# Altium PCB PCB1fb.PcbDoc
Units mil, origin at the board's own origin, x right, y up, seen from the top; angles counter-clockwise.
Board outline 765 x 2040 mil, 2 copper layers (Top Layer, Bottom Layer); 38 components, 55 nets, 170 pads, 23 vias.
Unrouted connection lines stored in the file: 49.
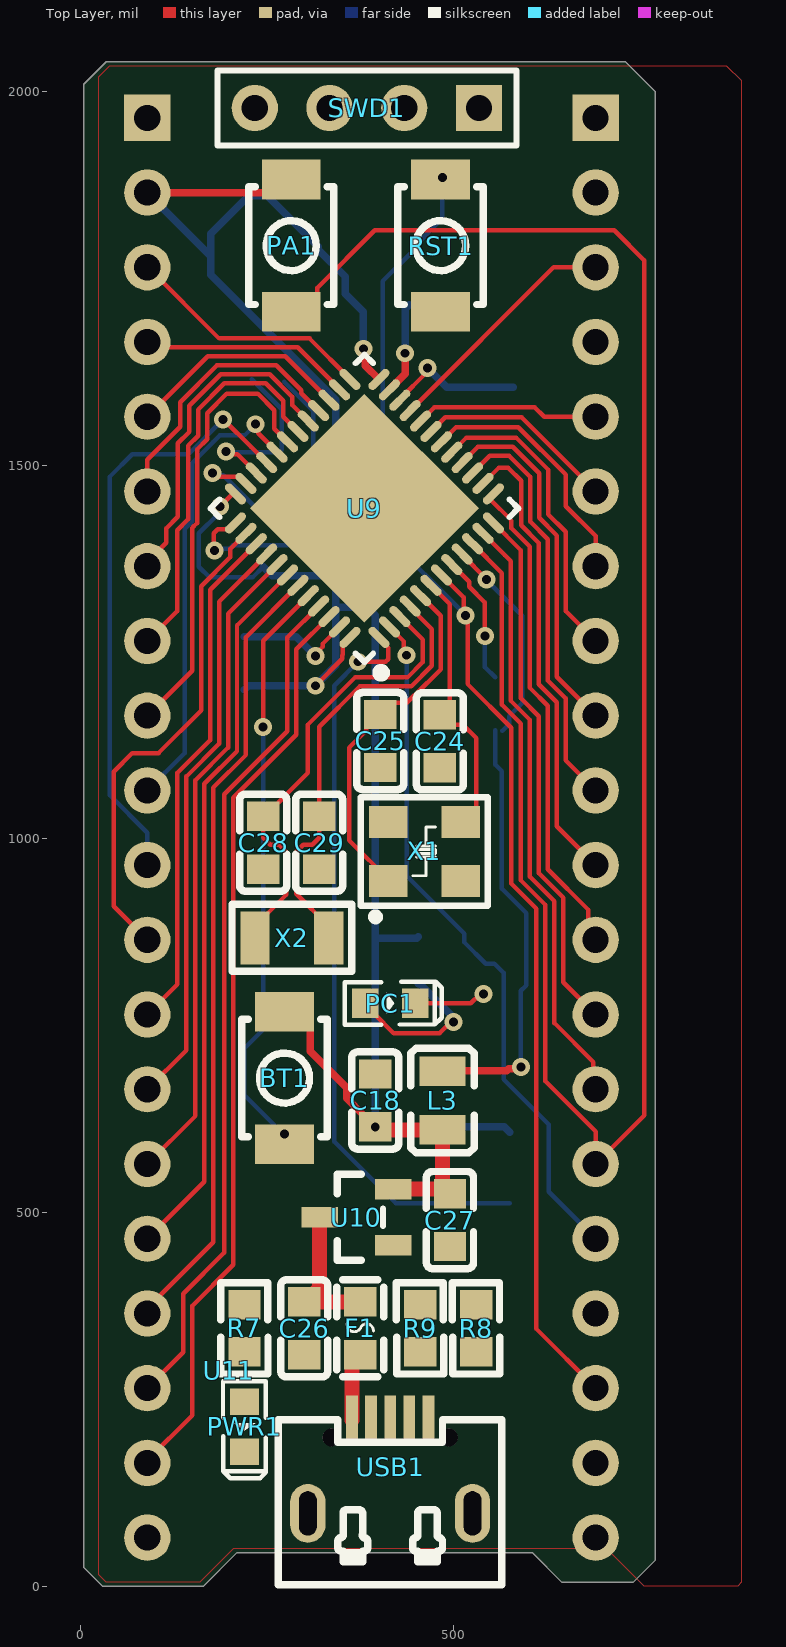
[diagram p0: Top Layer view]
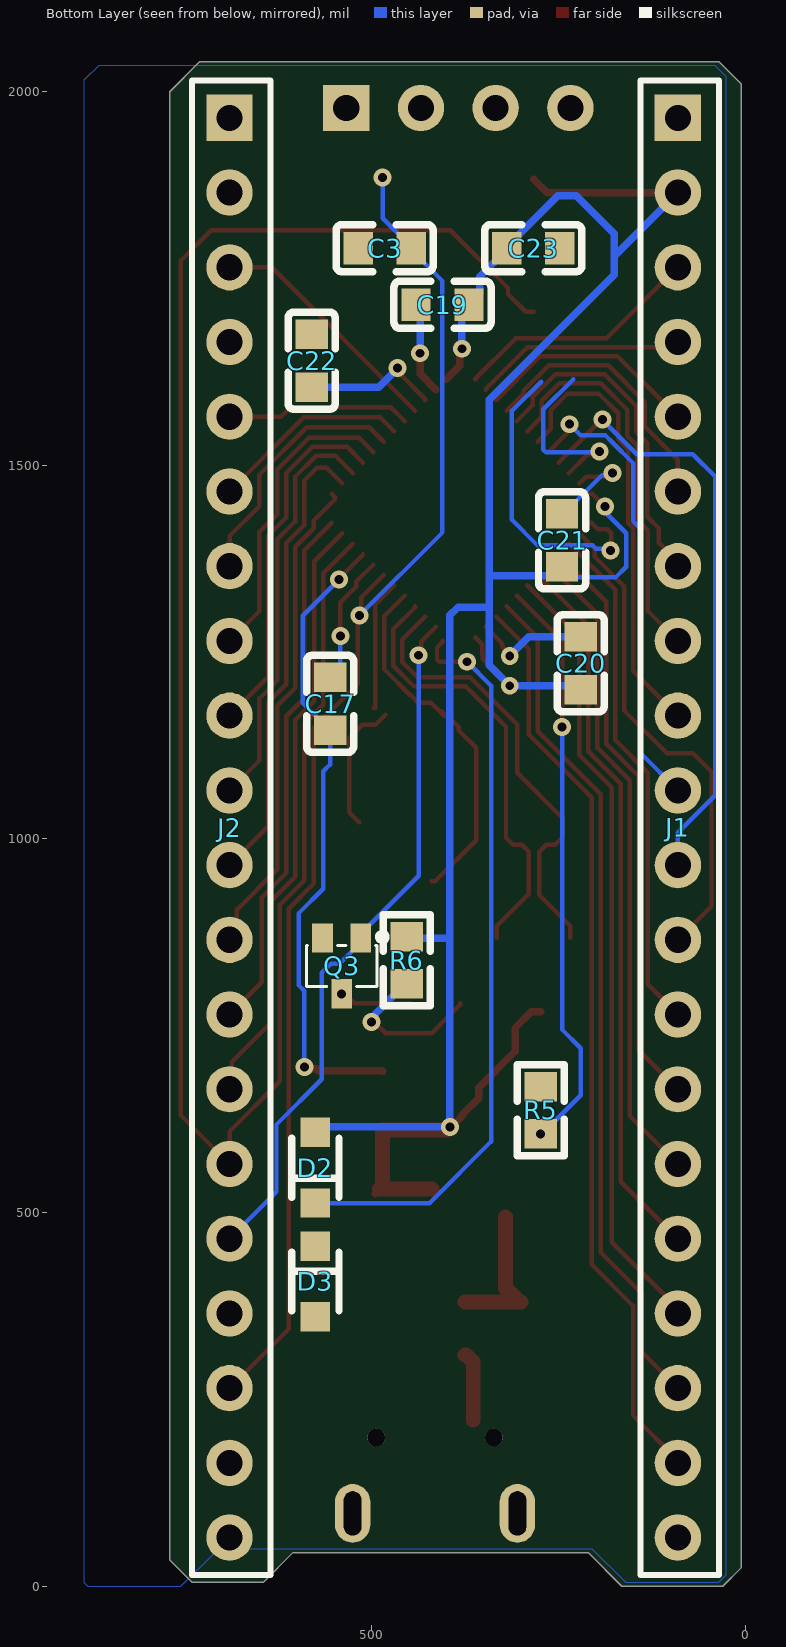
[diagram p1: Bottom Layer view, seen from below]

## Layer stack, top to bottom
Top Solder: solder mask 0.4, Solder Resist, Dk 3.5
Top Layer: signal copper 1.4
Dielectric 1: dielectric 12.6, FR-4, Dk 4.8
Bottom Layer: signal copper 1.4
Bottom Solder: solder mask 0.4, Solder Resist, Dk 3.5

## Board outline
5,25 30,0 165,0 210,45 605,45 645,5 740,5 770,35 770,2000 730,2040 35,2040 5,2010

## Design rules (kind name [scope] priority, off if disabled: settings)
Clearance [All] p1: gap=6 ignorepadtopadclearanceinfootprint=TRUE
PolygonConnect [All] p1: connectstyle=Relief reliefconductorwidth=10 reliefentries=4 polygonreliefangle="90 Angle" airgapwidth=10
RoutingVias [All] p1: holewidth=15.75 width=23.62 viastyle="Through Hole" minholewidth=15.75 minwidth=23.62 maxholewidth=28 maxwidth=50
SolderMaskExpansion [All] p1: expansion=4 istentingtop=FALSE
Width [All] p1: maxlimit=20 minlimit=6 preferedwidth=10
30 further rules are at their usual default settings.

## Components (designator, comment, footprint, x,y, rotation, side; value= is the part's Value field where it differs from the comment)
BT1 "TS-1088R-02026" SW-SMD_L3.9-W3.0-P4.45 273.56,680 r90 top
C3 "0.1u" C0603 482.45,1790.63 r180 bottom
C17 "0.1u" C0603 555.44,1180.85 r90 bottom
C18 "10u" C0603 395,650 r270 top
C19 "0.1u" C0603 405,1715 r180 bottom
C20 "0.1u" C0603 220,1235 r270 bottom
C21 "0.1u" C0603 245,1399.57 r270 bottom
C22 "4.7u" C0603 580,1640 r90 bottom
C23 "0.1u" C0603 283.46,1790.63 r180 bottom
C24 "10p" C0603 481.53,1130.54 r90 top
C25 "10p" C0603 401.71,1131.09 r270 top
C26 "10u" C0603 300,345 r90 top
C27 "1u" C0603 495,490 r90 top
C28 "5p" C0603 245,995 r90 top
C29 "5p" C0603 320,995 r90 top
D2 "BAT54WS_C397611" SOD-323_L1.8-W1.3-LS2.5-RD 575,560 r90 bottom
D3 "BAT54WS_C397611" SOD-323_L1.8-W1.3-LS2.5-RD 575,407.76 r270 bottom
F1 "0.5A/6V" F0603 375,345 r90 top
J1 "HDR-M-2.54_1x20" HDR-M-2.54_1X20 90,1015 r90 bottom locked
J2 "HDR-M-2.54_1x20" HDR-M-2.54_1X20 690,1015 r90 bottom
L3 "10uH" L0805 485,650 r90 top
PA1 "TS-1088R-02026" SW-SMD_L3.9-W3.0-P4.45 282.6,1793.96 r90 top
PC1 "LED-0603_R" LED0603_GREEN 415,780 r0 top
PWR1 "LED-0603_G" LED0603_GREEN 220,213.46 r270 top
Q3 "L2N7002WT1G" SC-70-3_L2.1-W1.3-P1.30-LS2.1-BR 540,830 r90 bottom
R5 "1k" R0603 273.56,636.9 r270 bottom
R6 "1k" R0603 452.69,837.79 r270 bottom
R7 "1k" R0603 220,345 r270 top
R8 "22" R0603 530,345 r270 top
R9 "22" R0603 455,345 r270 top
RST1 "TS-1088R-02026" SW-SMD_L3.9-W3.0-P4.45 482.45,1793.96 r270 top
SWD1 "HDR-M-2.54_1x4" HDR-M-2.54_1X4 383.85,1978.21 r180 top
U9 "STM32F401CCU6" UFQFPN-48_L7.0-W7.0-P0.50-BL-EP 380.55,1442.39 r45 top locked
U10 "XC6206P332MR" SOT-23(SOT-23-3) 369.85,493.85 r90 top
U11 "CH340E" MSOP-10_L3.0-W3.0-P0.50-LS5.0-BL 198.95,288.05 r90 top
USB1 "U-F-M5DW-Y-4" MICRO-USB-A12 415,160 r0 top
X1 "25MHz" XTAL-3225 415.35,945.71 r90 top
X2 "32.768KHz" OSC-SMD_L3.2-W1.5 283.33,867.72 r180 top

## Footprints (in the part's own frame and the unit in brackets; to place one, negate y for a bottom-side part, rotate by r counter-clockwise, add the part's x,y. Pads: shape width x height; smd on the part's side, far side on the other; paste and mask are expansions set on the pad)
C0603 [mm]
  rect 1x1.1 smd: 1(-0.9,0) 2(0.9,0)
  silkscreen extent -1.65,-0.8 1.65,0.8
F0603 [mm]
  rect 1x1.1 smd: 1(-0.9,0) 2(0.9,0)
  silkscreen extent -1.65,-0.8 1.65,0.8
HDR-M-2.54_1X4 [mil]
  rect 62x62 hole 35: 1(-150,0)
  round 62 hole 35: 2(-50,0) 3(50,0) 4(150,0)
  silkscreen extent -200,-50 200,50
HDR-M-2.54_1X20 [mil]
  rect 62x62 hole 35: 1(950,0)
  round 62 hole 35: 2(850,0) 3(750,0) 4(650,0) 5(550,0) 6(450,0) 7(350,0) 8(250,0) 9(150,0) 10(50,0) 11(-50,0) 12(-150,0) 13(-250,0) 14(-350,0) 15(-450,0) 16(-550,0) 17(-650,0) 18(-750,0) 19(-850,0) 20(-950,0)
  silkscreen extent -1000,-55 1000,50
L0805 [mm]
  rect 1x1.55 smd: 1(-1,0) 2(1,0)
  silkscreen extent -1.78,-1.08 1.78,1.08
LED0603_GREEN [mm]
  rect 0.9x1 smd: 1(-0.85,0) 2(0.85,0)
  silkscreen extent -1.54,-0.73 1.75,0.73
MICRO-USB-A12 [mm]
  rect 0.4x1.65 smd: 1(-1.3,1.59) 2(-0.65,1.59) 3(0,1.59) 4(0.65,1.59) 5(1.3,1.59)
  oval 1.2x2 hole 0.6 slot 1.5 at 90 deg: 6(2.799,-1.59) 7(-2.799,-1.59)
  round 0.6 hole 0.6 unplated: ""(-1.999,0.991) ""(1.999,0.991)
  silkscreen extent -3.8,-4.01 3.8,1.59
MSOP-10_L3.0-W3.0-P0.50-LS5.0-BL [mil]
OSC-SMD_L3.2-W1.5 [mm]
  rect 1x1.8 smd: 1(-1.25,0) 2(1.25,0)
  silkscreen extent -2.03,-1.14 2.03,1.14
R0603 [mm]
  rect 1x1.1 smd: 1(0.8,0) 2(-0.8,0)
  silkscreen extent -1.55,-0.81 1.55,0.8
SC-70-3_L2.1-W1.3-P1.30-LS2.1-BR [mm]
  rect 1x0.7 smd: 1(0.95,-0.65) 2(0.95,0.65) 3(-0.95,0)
  silkscreen extent -0.7,-1.63 1.23,1.2
SOD-323_L1.8-W1.3-LS2.5-RD [mm]
  rect 1x1 smd: 1(-1.2,0) 2(1.2,0)
  silkscreen extent -1,-0.8 1,0.8
SOT-23(SOT-23-3) [mm]
  rect 0.7x1.25 smd: 1(-0.95,-1.25) 2(0.95,-1.25) 3(0,1.25)
  silkscreen extent -1.46,-0.9 1.46,0.65
SW-SMD_L3.9-W3.0-P4.45 [mm]
  rect 1.35x2 smd: 1(-2.25,0) 2(2.25,0)
  silkscreen extent -2,-1.45 2,1.45
UFQFPN-48_L7.0-W7.0-P0.50-BL-EP [mm]
  oval 0.28x0.9 smd: 1(-2.751,-3.449) 2(-2.25,-3.449) 3(-1.75,-3.449) 4(-1.25,-3.449) 5(-0.749,-3.449) 6(-0.249,-3.449) 7(0.249,-3.449) 8(0.749,-3.449) 9(1.25,-3.449) 10(1.75,-3.449) 11(2.25,-3.449) 12(2.751,-3.449) 25(2.751,3.449) 26(2.25,3.449) 27(1.75,3.449) 28(1.25,3.449) 29(0.749,3.449) 30(0.249,3.449) 31(-0.249,3.449) 32(-0.749,3.449) 33(-1.25,3.449) 34(-1.75,3.449) 35(-2.25,3.449) 36(-2.751,3.449)
  oval 0.9x0.28 smd: 13(3.449,-2.751) 14(3.449,-2.25) 15(3.449,-1.75) 16(3.449,-1.25) 17(3.449,-0.749) 18(3.449,-0.249) 19(3.449,0.249) 20(3.449,0.749) 21(3.449,1.25) 22(3.449,1.75) 23(3.449,2.25) 24(3.449,2.751) 37(-3.449,2.751) 38(-3.449,2.25) 39(-3.449,1.75) 40(-3.449,1.25) 41(-3.449,0.749) 42(-3.449,0.249) 43(-3.449,-0.249) 44(-3.449,-0.749) 45(-3.449,-1.25) 46(-3.449,-1.75) 47(-3.449,-2.25) 48(-3.449,-2.751)
  rect 5.5x5.5 smd: 49(0,0)
  silkscreen extent -3.7,-4.5 3.7,3.7
XTAL-3225 [mil]
  rect 43.31x51.18 smd: 1(-2,3) 2(-2,-94) 3(77,-94) 4(77,3)
  silkscreen extent -55,-130 110,40, body extent -13,-108 85,18, height 31

## Part data
BT1 PA1 RST1: BOM_Manufacturer=XUNPU, BOM_Manufacturer Part=TS-1088R-02026, BOM_Supplier=LCSC, BOM_Supplier Part=C455280, Contributor=LCSC, spicePre=S, spiceSymbolName=TS-1088R-02026
D2 D3: BOM_Manufacturer=AnBon, BOM_Manufacturer Part=BAT54WS, BOM_Supplier=LCSC, BOM_Supplier Part=C397611, Contributor=LCSC, spicePre=D, spiceSymbolName=BAT54WS_C397611
F1: BOM_Manufacturer=BOURNS, BOM_Manufacturer Part=MF-FSMF050X-2, BOM_Supplier=LCSC, BOM_Supplier Part=C210357, Contributor=LCSC, spicePre=F, spiceSymbolName=MF-FSMF050X-2
L3: BOM_Manufacturer=microgate, BOM_Manufacturer Part=MGFI2012D100KT-LF, BOM_Supplier=LCSC, BOM_Supplier Part=C281097, Contributor=LCSC, nameAlias=Inductance, spicePre=L, spiceSymbolName=MGFI2012D100KT-LF
PC1: BOM_Manufacturer=EVERLIGHT(台湾亿光), BOM_Manufacturer Part=19-217/R6C-AL1M2VY/3T, BOM_Supplier=LCSC, BOM_Supplier Part=C72044, Contributor=LCEDA_01, spicePre=L, spiceSymbolName=LED-0603_R
PWR1: BOM_Manufacturer=EVERLIGHT(台湾亿光), BOM_Manufacturer Part=19-217/GHC-YR1S2/3T, BOM_Supplier=LCSC, BOM_Supplier Part=C72043, Contributor=LCEDA_Lib, spicePre=L, spiceSymbolName=LED-0603_G
Q3: BOM_LCSC Assembly=Yes, BOM_Manufacturer=LRC, BOM_Manufacturer Part=L2N7002WT1G, BOM_Supplier=LCSC, BOM_Supplier Part=C12778, SMT Type=Extend, spicePre=Q, spiceSymbolName=L2N7002WT1G
U9: BOM_Manufacturer=ST, BOM_Manufacturer Part=STM32F401CCU6, BOM_Supplier=LCSC, BOM_Supplier Part=C79861, spicePre=U, spiceSymbolName=STM32F401CCU6, subpart_no=1, tags=STM32
U10: BOM_LCSC Assembly=Yes, BOM_Manufacturer=TOREX, BOM_Manufacturer Part=XC6206P332MR, BOM_Supplier=LCSC, BOM_Supplier Part=C5446, image=//image.lceda.cn/szlcsc/C5446.jpg, SMT Type=Basic, spicePre=U
U11: BOM_LCSC Assembly=Yes, BOM_Manufacturer=WCH, BOM_Manufacturer Part=CH340E, BOM_Supplier=LCSC, BOM_Supplier Part=C99652, SMT Type=Extend, spicePre=U, spiceSymbolName=CH340E
USB1: BOM_Manufacturer=HRO, BOM_Manufacturer Part=U-F-M5DW-Y-4, BOM_Supplier=LCSC, BOM_Supplier Part=C145784, Contributor=LCSC, spicePre=U
X1: BOM_LCSC Assembly=Yes, BOM_Manufacturer="Zhejiang Abel Elec", BOM_Manufacturer Part=TAXM8M4RDBCCT2T, BOM_Supplier=LCSC, BOM_Supplier Part=C400090, Contributor=LCSC, nameAlias=Frequency, SMT Type=Extend, spicePre=X, spiceSymbolName=TAXM8M4RDBCCT2T
X2: BOM_Manufacturer=EPSON, BOM_Manufacturer Part=Q13FC1350004900, BOM_Supplier=LCSC, BOM_Supplier Part=C95361, nameAlias=Frequency, spicePre=X, spiceSymbolName=Q13FC1350004900
C3 C17 C19 C20 C21 C22 C23 C24 C25 C28 C29: Contributor=LCEDA_Lib, nameAlias=Value(F), spicePre=C, spiceSymbolName=C_0402_US
C18: Contributor=LCEDA_Lib, nameAlias=Value(F), spicePre=C, spiceSymbolName=C_0805_US
C26: nameAlias=Value(F), spicePre=C, spiceSymbolName=Cap_0805_US
C27: nameAlias=Value(F), spicePre=C, spiceSymbolName=Cap_RAD-0.1_US
J1 J2: BOM_Supplier=LCSC, BOM_Supplier Part=C50981, Contributor=LCEDA_Lib, spicePre=J, spiceSymbolName=HDR-M-2.54_1x20
R5 R6 R7: Contributor=LCEDA_Lib, nameAlias=Value(Ω), spicePre=R, spiceSymbolName=R_0402_US
R8 R9: Contributor=LCEDA_Lib, nameAlias=Value(Ω), spicePre=R, spiceSymbolName=R_0603_US
SWD1: BOM_Supplier=LCSC, BOM_Supplier Part=C124378, Contributor=LCEDA_Lib, spicePre=J, spiceSymbolName=HDR-M-2.54_1x4

## Via types
v1: diameter 24, hole 12, Top Layer to Bottom Layer, 23 vias

## Nets (pads, with @x,y where several pads share a name; then routed paths per layer and width w, separated by ;. In a path a pad name is that pad's centre, name@x,y a point inside that pad or via, vN(x,y) a via of type N, cw(c..) or ccw(c..) an arc to the next point about the centre after c; other vN are vias at no path point)
+5V: C26.2 F1.2 J1.20 J2.1 J2.4 U10.3 | length 196.2
  Top Layer w20: C26.2 C26.2@301.97,380.43 ; U10.3 320.65,399.11 C26.2@301.97,380.43 ; F1.2 C26.2@301.97,380.43
BAT: D3.2 J2.17
BOOT0: BT1.1 R5.1 U9.44 | length 778.8
  Top Layer w6: v1(245,1149.88) 245,1265.12 U9.44
  Bottom Layer w6: v1(245,1149.88) 245,745 220,720 220,657.01 271.59,605.41 v1(273.56,605.41)
GND: C3.1 C17.2 C18.1 C19.1 C20.1 C21.1 C22.2 C24.1 C25.2 C26.1 C27.1 C28.1 C29.1 J1.1 J2.2 J2.19 PWR1.2 Q3.2 R5.2 RST1.2 SWD1.4 U9.8 U9.23 U9.35 U9.47 U10.1 USB1.5 USB1.6 USB1.7 X1.2 X1.4 | length 598
  Top Layer w6: v1(177.51,1490) 182.09,1490 187.11,1484.98 212.67,1484.98 U9.35 ; v1(315,1245) 315,1247.52 324.99,1257.51 324.99,1261.53 U9.47 ; U9.8 520.63,1344.04 520.63,1337.54 541.69,1316.47 v1(541.69,1271.65)
  Top Layer w10: U9.23 413.93,1601.35 435,1622.42 v1(435,1650)
  Bottom Layer w6: v1(177.51,1490) 180.95,1486.56 191.48,1486.56 243.03,1435 C21.1 ; v1(541.69,1271.65) 541.69,1230.03 C17.2
  Bottom Layer w10: C20.1 289.57,1270.43 v1(315,1245) ; v1(435,1650) 435,1709.57 C19.1
NetF1_1: F1.1 USB1.1 | length 92.5
  Top Layer w20: USB1.1 363.8,299.88 373.49,309.57 F1.1
NetJP1_1: R8.1 USB1.3
NetJP1_2: 
NetJP2_1: R9.1 USB1.2
NetJP2_2: 
NetJP3_1: 
NetJP4_1: 
NetPC1_1: PC1.1 R6.1 | length 214.4
  Top Layer w6: PC1.1 381.53,778.03 394.25,765.32 419.56,740 481.06,740 496.06,755 v1(500,755)
  Bottom Layer w10: R6.1 454.66,806.29 497.32,763.63 497.32,757.68 v1(500,755)
NetPC1_2: PC1.2 Q3.3 | length 96.8
  Top Layer w6: PC1.2 522.9,780 535.49,792.6 v1(540,792.6)
NetPWR1_1: PWR1.1 R7.1
NRST: C3.2 J2.18 RST1.1 U9.7 | length 1838.4
  Top Layer w6: U9.7 513.62,1323.19 513.62,1301.57 v1(516,1299.19) ; v1@515.4,1298.6 518.54,1295.46 518.54,1207.38 577.09,1148.82 577.09,940.38 610.79,906.68 610.79,344.21 J2.18
  Bottom Layer w6: v1(485,1885) 485,1830.58 447.02,1792.6 447.02,1788.66 405,1746.64 405,1410.19 v1(516,1299.19)
OSC32-IN: C28.2 U9.3 X2.2 | length 610.3
  Top Layer w6: X2.2 234.12,883.47 275.65,925.01 275.65,982.98 266.27,992.36 254.38,992.36 245,1001.75 C28.2 246.97,1030.43 305,1088.47 305,1153.08 368.04,1216.12 438.09,1216.12 458.72,1236.75 458.72,1266.79 U9.3
OSC32-OUT: C29.2 U9.4 X2.1 | length 597
  Top Layer w6: X2.1 332.54,883.47 289.35,926.67 289.35,982.98 298.73,992.36 310.62,992.36 320,1001.75 C29.2 320,1150.06 374.06,1204.12 443.06,1204.12 470.72,1231.78 470.72,1280.91 441.88,1309.75 441.25,1309.75 441.79,1310.28 U9.4
OSC-IN: C25.1 U9.5 X1.1 | length 492.8
  Top Layer w6: C25.1 406.14,1170.95 C25.1@408.11,1170.95 ; X1.1@419.27,943.08 415.33,943.08 360,998.41 360,1121.99 383.06,1145.05 383.06,1149.84 398.33,1165.11 403.12,1165.11 407.55,1169.54 420.37,1182.36 437.36,1182.36 447.12,1192.12 448.03,1192.12 482.72,1226.81 482.72,1298.51 U9.5
OSC-OUT: C24.2 U9.6 X1.3 | length 356.4
  Top Layer w6: U9.6 495,1314.09 495,1175.43 C24.2@496.97,1175.43 ; C24.2 494.74,1152.76 512.24,1152.76 530,1135 530,1035.8 X1.3@516.27,1022.08
PA0: C23.2 J2.15 PA1.1 U9.10 | length 2673.7
  Top Layer w6: PA1.1 293.75,1705.38 317.32,1728.95 317.32,1737.32 394.56,1814.56 714.66,1814.56 755,1774.21 755,630 J2.15 690,608.43 622.79,675.64 622.79,911.65 590,944.44 590,1154.3 564.63,1179.67 564.63,1355.76 U9.10
PA1: J2.14 U9.11 | length 806.5
  Top Layer w6: U9.11 568.61,1379.64 576.63,1371.62 576.63,1184.64 602,1159.27 602,949.41 634.79,916.62 634.79,753.62 686.93,701.49 686.93,668.07 J2.14
PA2: J2.13 U9.12 | length 714.6
  Top Layer w6: U9.12 590,1386.11 590,1188.24 614,1164.24 614,954.38 646.79,921.59 646.79,808.21 J2.13
PA3: J2.12 U9.13 | length 657.5
  Top Layer w6: U9.13 548.35,1457.03 548.35,1455.05 577.3,1426.1 577.3,1415.78 602,1391.08 602,1202.09 626,1178.09 626,959.36 680.36,905 680.36,874.64 J2.12
PA4: J2.11 U9.14 | length 622.5
  Top Layer w6: U9.14 560,1496.54 573.22,1496.54 590.3,1479.45 590.3,1419.75 614,1396.05 614,1207.06 638,1183.06 638,1017 J2.11
PA5: J2.10 U9.15 | length 554
  Top Layer w6: U9.15 548.26,1512.66 574.06,1512.66 602.3,1484.42 602.3,1424.72 626,1401.02 626,1212.03 650,1188.03 650,1105 J2.10
PA6: J2.9 U9.16 | length 482
  Top Layer w6: U9.16 532.4,1524.66 579.03,1524.66 614.3,1489.39 614.3,1429.69 638,1405.99 638,1217 J2.9
PA7: J2.8 U9.17 | length 410
  Top Layer w6: U9.17 516.54,1536.66 584,1536.66 626.3,1494.36 626.3,1434.66 650,1410.96 650,1305 J2.8
PA8: J1.7 U9.29 | length 446.9
  Top Layer w6: J1.7 90,1370.85 115.36,1396.21 115.36,1415.55 130.79,1430.99 130.79,1529.43 146,1544.64 146,1579.64 188.16,1621.8 253.72,1621.8 284,1591.52 284,1580.67 U9.29
PA9: J1.8 U9.30 | length 525.1
  Top Layer w6: J1.8 130,1305 130,1413.22 144.51,1427.73 144.51,1526.18 158,1539.67 158,1574.67 193.13,1609.8 248.42,1609.8 272,1586.22 272,1564.81 U9.30
PA10: J1.9 U9.31 | length 597.5
  Top Layer w6: J1.9 150,1225 150,1416.25 156.51,1422.76 156.51,1521.21 170,1534.69 170,1569.69 196.3,1596 237.74,1596 260,1573.74 260,1549.09 U9.31
PA11: J1.10 R9.2 U9.32 | length 618.7
  Top Layer w6: v1(235,1555) 238.44,1551.56 238.44,1542.79 U9.32
  Bottom Layer w6: J1.10 140,1115 140,1415 150,1425 150,1503.03 177.77,1530.8 186.97,1540 220,1540 v1(235,1555)
PA12: J1.11 R8.2 U9.33 | length 805.7
  Top Layer w6: v1(191.04,1561.04) 192.33,1561.04 229.37,1524 U9.33
  Bottom Layer w6: J1.11 90,1008.43 40,1058.43 40,1485 70,1515 145,1515 v1(191.04,1561.04)
PA15: J1.12 U9.38 | length 656.4
  Top Layer w6: J1.12 45,910 45,1090 70,1115 105,1115 162,1172 162,1338.25 201,1377.25 201,1388.14 U9.38
PB0: J2.7 U9.18 | length 340.1
  Top Layer w6: U9.18 503.07,1551.05 586.58,1551.05 650,1487.64 650,1445.41 690,1405.41 J2.7
PB1: J2.6 U9.19 | length 269.3
  Top Layer w6: U9.19 488.54,1564.24 590.76,1564.24 J2.6
PB2: J2.5 U9.20 | length 247.3
  Top Layer w6: U9.20 474.29,1577.85 608.15,1577.85 621,1565 J2.5
PB3: J1.13 U9.39 | length 690.5
  Top Layer w6: J1.13 130.35,805.35 130.35,1088.64 174,1132.29 174,1333.28 U9.39
PB4: J1.14 U9.40 | length 782.3
  Top Layer w6: J1.14 142.35,717.35 142.35,1083.67 186,1127.32 186,1317.42 U9.40
PB5: J1.15 U9.41 | length 874.2
  Top Layer w6: J1.15 154.35,629.35 154.35,1078.7 198,1122.35 198,1301.56 U9.41
PB6: J1.16 U9.42 | length 966
  Top Layer w6: J1.16 166.35,541.35 166.35,1073.73 210,1117.38 210,1285.7 U9.42
PB7: J1.17 U9.43 | length 1057.9
  Top Layer w6: J1.17 90,371.97 178.35,460.32 178.35,1068.76 222,1112.41 222,1269.98 U9.43
PB8: J1.18 U9.45 | length 1141.6
  Top Layer w6: J1.18 138,313 138,391.53 193,446.53 193,1059.97 277.35,1144.32 277.35,1269.61 U9.45
PB9: J1.19 U9.46 | length 1233.4
  Top Layer w6: J1.19 90,168.47 150,228.47 150,375 205,430 205,1055 289.35,1139.35 289.35,1253.75 U9.46
PB10: J2.3 U9.21 | length 327.7
  Top Layer w6: U9.21 633.58,1765 J2.3
PB12: J1.3 U9.25 | length 334
  Top Layer w6: J1.3 90.82,1765 92.26,1763.56 186.02,1669.8 307.13,1669.8 361.05,1615.88 361.05,1615.76 360.7,1615.41 U9.25
PB13: J1.4 U9.26 | length 284.5
  Top Layer w6: J1.4 97.2,1657.8 291.27,1657.8 345.36,1603.71 347.18,1601.89 346.77,1601.48 U9.26
PB14: J1.5 U9.27 | length 301
  Top Layer w6: J1.5 170.8,1645.8 274.59,1645.8 U9.27
PB15: J1.6 U9.28 | length 370.8
  Top Layer w6: J1.6 90,1507.63 134,1551.62 134,1584.61 183.19,1633.8 262.49,1633.8 296,1600.29 296,1596.53 U9.28
PC13: J2.16 Q3.1 U9.2 | length 939.9
  Top Layer w6: U9.2 433.42,1264.23 433.42,1249.26 v1(436.86,1245.81)
  Bottom Layer w6: v1(436.86,1245.81) 436.86,950.86 514.41,873.31 Q3.1 514.41,861.5 542.86,833.05 554.58,833.05 566.68,820.96 566.68,678.32 627.14,617.86 627.14,527.86 J2.16
SWCLK: SWD1.3 U9.37 | length 408.4
  Top Layer w6: v1(180,1385.95) 179,1386.95 179,1409 184.32,1414.32 197,1414.32 205.63,1422.95 U9.37
  Bottom Layer w6: v1(180,1385.95) 182.5,1388.44 199.63,1388.44 204,1392.82 277.82,1392.82 312.01,1427.01 312.01,1572.99 272.97,1612.03
SWDIO: SWD1.2 U9.34 | length 240.4
  Top Layer w6: v1(195.02,1518.35) 198.46,1514.9 210.61,1514.9 U9.34
  Bottom Layer w6: v1(195.02,1518.35) 195.9,1517.46 266.49,1517.46 270,1520.98 270,1575 229.73,1615.27
VBAT: D2.1 D3.1 U9.1 | length 993.9
  Top Layer w6: v1(372,1237.12) 408.83,1237.12 412.35,1240.63 412.35,1256.08 404.7,1263.74 U9.1@404.7,1265.09
  Bottom Layer w6: v1(372,1237.12) 340,1205.12 340,595 422.24,512.76 D2.1
VCAP1: C22.1 U9.22 | length 183.8
  Top Layer w6: U9.22 427.86,1588.5 465,1625.64 v1(465,1630)
  Bottom Layer w10: v1(465,1630) 490.43,1604.57 C22.1
VCC: BT1.2 C18.2 C19.2 C20.2 C21.2 C23.1 C27.2 D2.2 J1.2 J2.20 L3.1 PA1.2 R6.2 R7.2 SWD1.1 U9.24 U9.36 U9.48 U10.2 | length 3359
  Top Layer w6: v1(187.44,1445) 204.47,1462.04 207.75,1462.04 U9.36 ; v1(315,1205) 351,1241 351,1245.82 351.78,1246.59 351.78,1260.46 U9.48
  Top Layer w10: J1.2 265.05,1865 PA1.2 ; BT1.2 286.36,768.59 307.93,747.01 307.93,715.6 356.67,666.86 356.67,652.89 378.35,631.22 378.35,629.25 396.97,610.63 C18.2@398.94,610.63 ; v1(379.02,1655.98) 381.7,1653.3 381.7,1633.3 U9.24 ; C27.2@485,535.43 489.18,531.25 C27.2
  Top Layer w20: C18.2@398.94,610.63 L3.1 C27.2@485,535.43 ; U10.2 C27.2@489.18,531.25
  Bottom Layer w6: v1(187.44,1445) 183.99,1441.56 183.99,1433.99 159,1409 159,1364.46 173.46,1350 230.87,1350 C21.2
  Bottom Layer w10: J1.2 175,1780 ; C20.2 225.43,1205 v1(315,1205) 342.25,1232.25 342.25,1310 ; C21.2 257.12,1352.01 342.25,1352.01 ; v1(379.02,1655.98) 379.02,1705.55 C19.2 354.88,1729.68 354.88,1752.68 318.9,1788.66 C23.1 318.9,1792.6 250.64,1860.86 225.86,1860.86 175,1810 175,1780 ; R6.2 450.31,866.9 395,866.9 ; D2.2 567.68,614.57 v1(395,614.57) 395,866.9 ; 175,1780 175,1755 342.25,1587.75 342.25,1352.01 ; 342.25,1310 384.26,1310 395,1299.26 395,866.9 ; 342.25,1310 342.25,1352.01
VDDA: C17.1 L3.2 U9.9 | length 858.9
  Top Layer w6: U9.9 511.37,1380.24 543.63,1347.99 v1(543.63,1347.07)
  Top Layer w10: L3.2 485.63,690 571.21,690 573.53,692.32 587.11,692.32 v1(589.79,695)
  Bottom Layer w6: v1(543.63,1347.07) 591.94,1298.75 591.94,1181.94 574.09,1164.09 574.09,1153.66 C17.1@565,1144.57 ; C17.1 555.44,1099.56 564.58,1090.42 564.58,933.3 597.08,900.79 597.08,803.98 589.79,796.69 v1(589.79,695)
pads on no net: U9.49 USB1. USB1.4

## Polygon pours and split planes (outlines as drawn)
no net on Top Layer "NONET_L01_P001" (solid, shelved, pour order 1): 865,2035 885,2015 885,5 880,0 755,0 710,45 710,50 205,50 160,5 35,5 25,15 25,2020 40,2035
GND on Bottom Layer "NONET_L02_P000" (solid, shelved, pour order 0): 865,2035 885,2015 885,5 880,0 755,0 710,45 710,50 205,50 160,5 35,5 25,15 25,2020 40,2035

## Silkscreen, mask and mechanical layers (free items; w line width, h text height)
Mechanical 1:
  the board outline again, w10